# EAGLE board VelocistaEdu_completo (EAGLE 6.5.0)
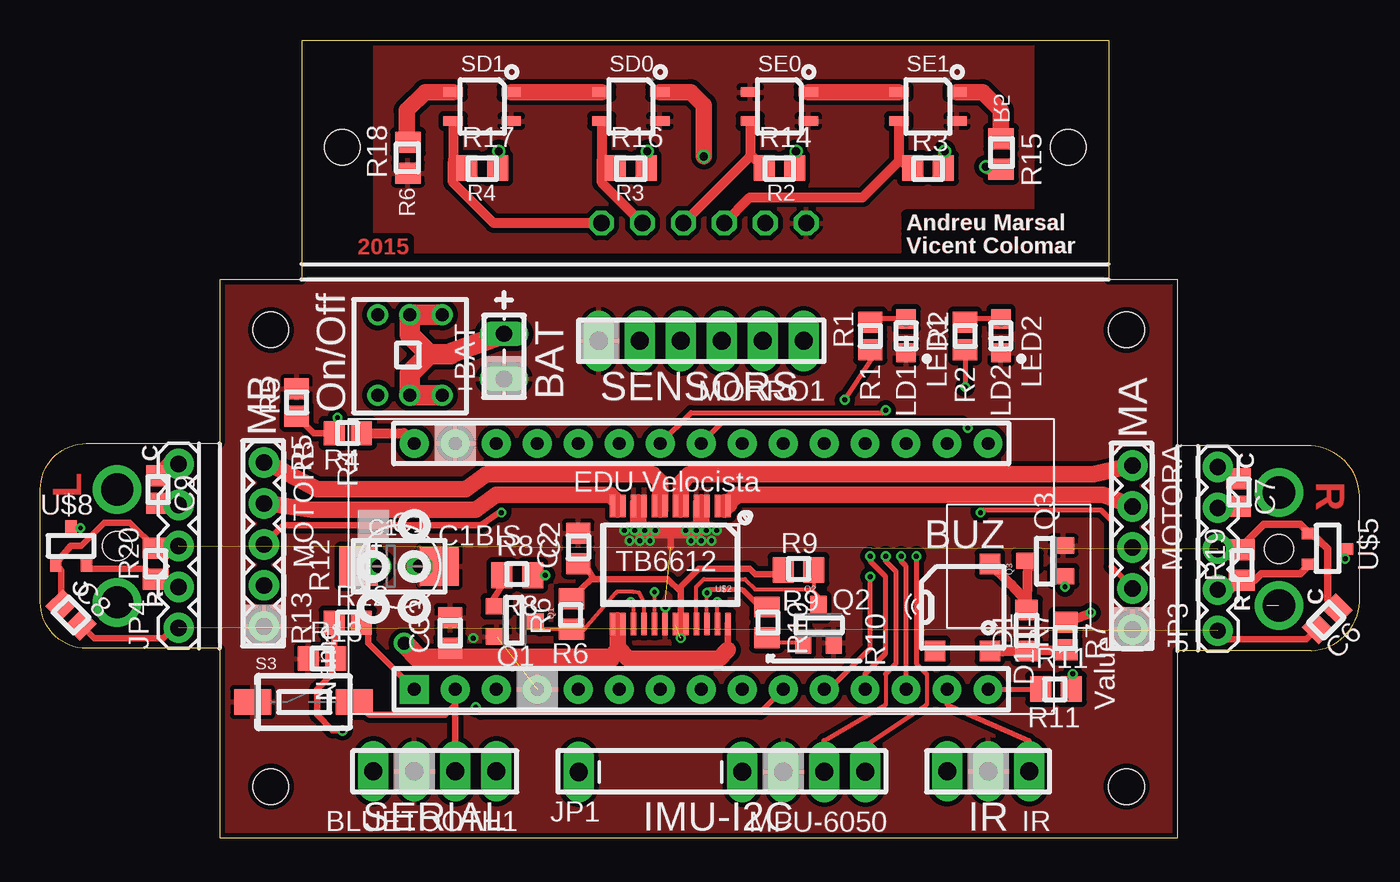
[diagram p0: board, top side]
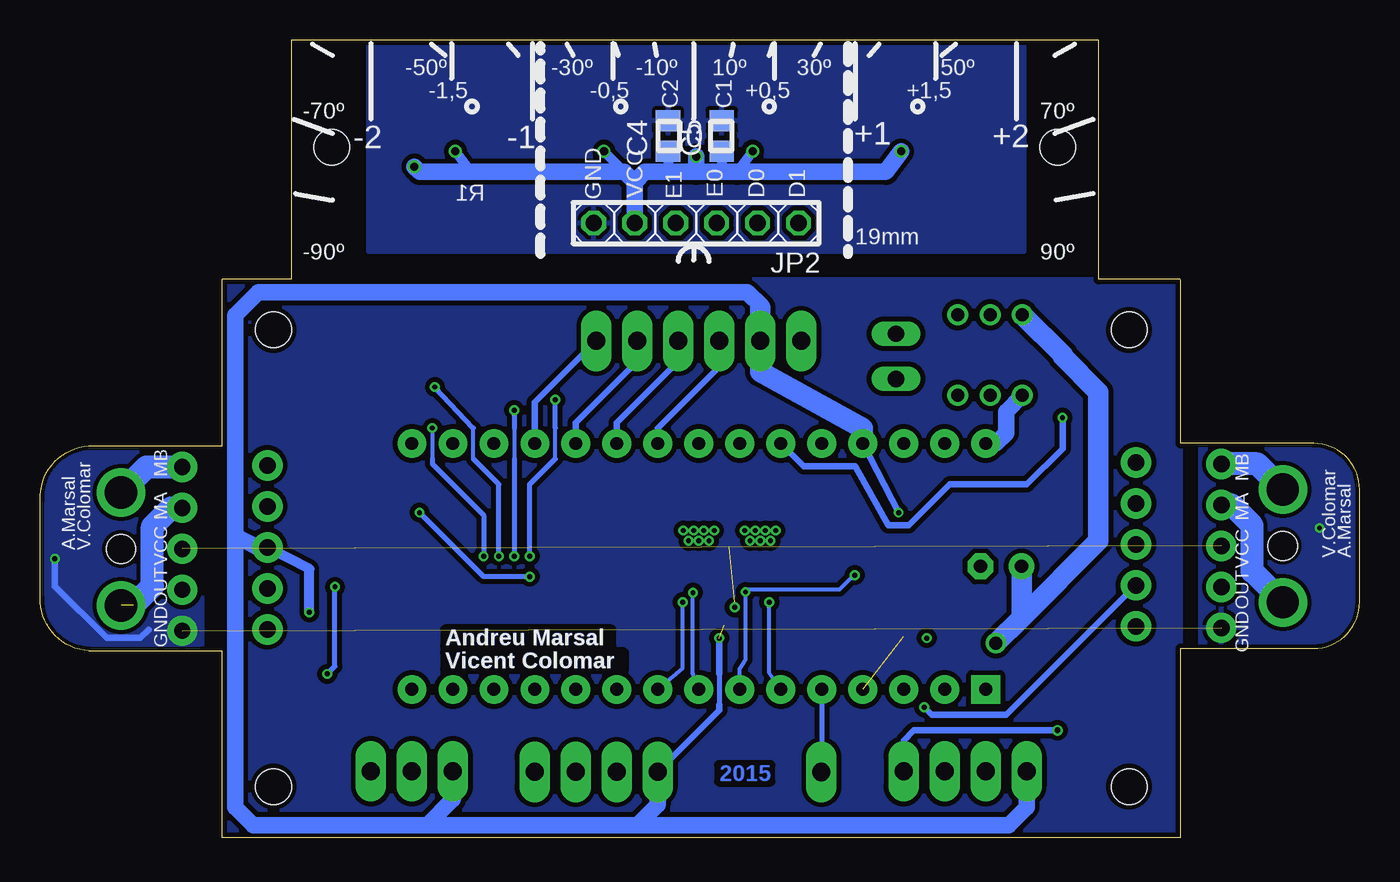
[diagram p1: board, bottom side, seen from below]

Size 81.76 x 49.42 mm. Coordinates in mm from the lower left corner, seen from the top.
Outline: 70.47,0 11.11,0 11.11,11.75 2.86,11.75 arc-90 0,14.61 0,21.59 arc-90 2.86,24.45 11.11,24.45 11.11,34.6
Outline: 71.76,24.29 78.76,24.29 arc-90 81.76,20.91 81.76,14.91 arc-90 78.76,11.61 71.76,11.61
Outline: 16.2,35.56 16.2,49.42 66.2,49.42 66.2,35.56
Outline: 11.11,34.61 16.19,34.61 16.19,35.56
Outline: 71.76,11.59 70.48,11.59 70.48,0
Outline: 71.76,24.29 70.48,24.29 70.48,34.61 66.2,34.61 66.2,35.56
Copper layers (1*16): Top 0.035mm / dielectric 1.5mm / Bottom 0.035mm
Design rules "Elecrow_2-layer_eagle_rule": minimum track width 6mil, minimum drill 12mil, track to track 6mil, track to pad 6mil, pad to pad 6mil, via to via 6mil, smd to smd 0mil, copper to edge 10mil, drill to drill 10mil, minimum pad ring 10mil, minimum via ring 6mil, stop-mask expansion 2mil, vias tented up to drill 100mil, thermal gap 10mil
Holes 2.2 mm at 67.31,31.48 67.31,3.17 14.29,31.48 14.29,3.17 18.7,42.81 63.7,42.81
Holes 1.8 mm at 76.76,17.91 4.76,18.1

## Footprints (pad centres in the part's own frame; a part is rotated, then mirrored left to right if it is on the bottom)
1X02_LOCK_LONGPADS = drill 1.016 long: 1 -0.127,0; 2 2.667,0
1X04_LONGPADS = drill 1.118 pad 1.88 long: 1 0,0; 2 2.54,0; 3 5.08,0; 4 7.62,0
SMC_C = smd 2.4 x 2.4: + -2.5,0; - 2.5,0
E2,5-5 = drill 0.813 pad 1.6: + -1.27,0 | drill 0.813 pad 1.6 octagon: - 1.27,0
C0805 = smd 1.3 x 1.5: 1 -0.95,0; 2 0.95,0
C0805' = smd 1.3 x 1.5: 1 -0.85,0; 2 0.85,0
MICROMELF-W = smd 1.27 x 1.4: A 1.268,0; C -1.268,0
AYZ0202_TH = drill 0.8: B1 -2.5,-2; B2 2.5,-2; C1 -2.5,0; C2 2.5,0; D1 -2.5,2; D2 2.5,2
1X03_LONGPADS = drill 1.118 pad 1.88 long: 1 0,0; 2 2.54,0; 3 5.08,0
1X01_LONGPAD = drill 1.118 pad 1.88 long: 1 0,0
1X06 = drill 1.016 octagon: 1 -6.35,0; 2 -3.81,0; 3 -1.27,0; 4 1.27,0; 5 3.81,0; 6 6.35,0
1X05 = drill 1.016 pad 1.88: 1 0,0; 2 2.54,0; 3 5.08,0; 4 7.62,0; 5 10.16,0
CHIPLED_0805 = smd 1.2 x 1.2: A 0,-1.05; C 0,1.05
1X06_LONGPADS = drill 1.118 pad 1.88 long: 1 0,0; 2 2.54,0; 3 5.08,0; 4 7.62,0; 5 10.16,0; 6 12.7,0
SOT23 = smd 1 x 1.4: 1 -0.95,-1.1; 2 0.95,-1.1; 3 0,1.1
R0805 = smd 1.3 x 1.5: 1 -0.85,0; 2 0.85,0
M0805@1 = smd 1.3 x 1.6: 1 -0.95,0; 2 0.95,0
M0805 = smd 1.3 x 1.6: 1 -0.95,0; 2 0.95,0
TACTILE-SWITCH-1101NE = smd 2.3 x 1.6: P$1 -3.15,0; P$2 3.15,0
SMT-0540-S-R = smd 1.27 x 1.27: + 1.7,-2.7; - 1.7,2.7; M -1.7,-2.7
QRE1113 = smd 1.2 x 0.6: 1 -1.8,-0.9; 2 1.8,-0.9; 3 1.8,0.9; 4 -1.8,0.9
PDIP-32NOHOLES = drill 0.8 pad 1.778: 3V3 7.62,-15.24; +5V 7.62,10.16; A0 7.62,-10.16; A1 7.62,-7.62; A2 7.62,-5.08; A3 7.62,-2.54; A4 7.62,0; A5 7.62,2.54; A6 7.62,5.08; A7 7.62,7.62; AREF 7.62,-12.7; D0/RX -7.62,15.24; D2 -7.62,7.62; D3 -7.62,5.08; D4 -7.62,2.54; D5 -7.62,0; D6 -7.62,-2.54; D7 -7.62,-5.08; D8 -7.62,-7.62; D9 -7.62,-10.16; D10 -7.62,-12.7; D11 -7.62,-15.24; D12 -7.62,-17.78; D13 7.62,-17.78; GND -7.62,10.16; GND1 7.62,15.24; RESET -7.62,12.7; RESET1 7.62,12.7; VIN 7.62,17.78 | drill 0.8 pad 1.778 square: D1/TX -7.62,17.78
SSOP24 = smd 0.348 x 1.397: 1 -3.575,-3.656; 2 -2.925,-3.656; 3 -2.275,-3.656; 4 -1.625,-3.656; 5 -0.975,-3.656; 6 -0.325,-3.656; 7 0.325,-3.656; 8 0.975,-3.656; 9 1.625,-3.656; 10 2.275,-3.656; 11 2.925,-3.656; 12 3.575,-3.656; 13 3.575,3.656; 14 2.925,3.656; 15 2.275,3.656; 16 1.625,3.656; 17 0.975,3.656; 18 0.325,3.656; 19 -0.325,3.656; 20 -0.975,3.656; 21 -1.625,3.656; 22 -2.275,3.656; 23 -2.925,3.656; 24 -3.575,3.656
TERMINAL_MOTOR_N20 = drill 2 pad 3: P$1 0,0
DBZ_R-PDSO-G3 = smd 0.7 x 1: 1 -0.95,-1.1; 2 0.95,-1.1; 3 0,1.1

## Placement (x,y rotation side)
+BAT  [1X02_LOCK_LONGPADS]  28.73,28.57 90 top
BLUETOOTH1  [1X04_LONGPADS]  28.26,4.13 180 top
C1  >=10 uF  [SMC_C]  22.23,16.83 0 top
C1BIS  [E2,5-5]  22.23,16.83 0 top
C2  100nF  [C0805]  33.34,17.94 90 top
C3  100nF  [C0805]  25.4,12.7 90 top
C4  1uF  [C0805]  42.86,43.5 90 bottom
C5  100nF  [C0805]  39.53,43.5 90 bottom
C6  100nF  [C0805']  79.75,13.58 225 top
C7  3.3nF  [C0805']  74.26,21.4 270 top
C8  100nF  [C0805']  1.91,13.81 315 top
C9  3.3nF  [C0805']  7.3,21.59 270 top
D1  [MICROMELF-W]  61.12,12.86 90 top
GENERAL_SWITCH  AYZ0202_TH  [AYZ0202_TH]  22.9,29.92 270 top
IR  [1X03_LONGPADS]  61.28,4.13 180 top
JP1  [1X01_LONGPAD]  33.35,4.08 180 top
JP2  [1X06]  41.11,38.1 180 bottom
JP3  [1X05]  72.96,12.83 90 top
JP4  [1X05]  8.57,13.02 90 top
LED1  [CHIPLED_0805]  53.66,31.11 180 top
LED2  [CHIPLED_0805]  59.53,31.11 180 top
MORRO1  [1X06_LONGPADS]  47.31,30.8 180 top
MOTORA  [1X05]  67.69,23.08 270 top
MOTORB  [1X05]  13.86,23.27 270 top
MPU-6050  [1X04_LONGPADS]  51.13,4.09 180 top
Q1  [SOT23]  29.39,13.41 270 top
Q2  [SOT23]  48.22,13.2 0 top
Q3  [SOT23]  62.28,17.17 90 top
R1  470  [R0805]  51.43,31.11 90 top
R2  470  [R0805]  57.31,31.11 90 top
R3  [M0805@1]  55.01,41.51 0 top
R4  33K  [R0805]  19.05,25.08 180 top
R5  39K  [R0805]  15.87,26.99 90 top
R6  [M0805]  32.92,13.87 90 top
R7  22  [R0805]  63.53,12.5 90 top
R8  [M0805]  29.55,16.28 180 top
R9  [M0805]  46.98,16.6 180 top
R10  [M0805]  45.03,13.36 270 top
R11  180  [M0805]  62.95,9.23 0 top
R12  470  [R0805]  19.05,13.34 0 top
R13  470  [R0805]  17.46,11.11 0 top
R14  [M0805]  45.8,41.51 0 top
R15  [M0805]  59.53,42.39 270 top
R16  [M0805]  36.59,41.51 0 top
R17  [M0805]  27.38,41.51 0 top
R18  [M0805]  22.78,42.15 90 top
R19  10k  [M0805]  74.46,16.91 90 top
R20  10k  [M0805]  7.14,16.99 90 top
S3  SWITCH-MOMENTARY-2-SMD-1101NE  [TACTILE-SWITCH-1101NE]  16.31,8.42 0 top
SPK1  SMT-0540-S-R  [SMT-0540-S-R]  57.15,14.29 0 top
U1  QRE1113  [QRE1113]  55.01,45.32 180 top
U2  QRE1113  [QRE1113]  45.8,45.32 180 top
U3  QRE1113  [QRE1113]  36.59,45.32 180 top
U4  QRE1113  [QRE1113]  27.38,45.32 180 top
U$1  ARDUINONANONOHOLES  [PDIP-32NOHOLES]  40.95,16.82 90 top
U$2  TB6612FNG  [SSOP24]  39.04,16.92 180 top
U$3  TERMINAL_MOTOR_N20  [TERMINAL_MOTOR_N20]  76.76,21.41 270 top
U$4  TERMINAL_MOTOR_N20  [TERMINAL_MOTOR_N20]  76.76,14.41 270 top
U$5  DRV5013  [DBZ_R-PDSO-G3]  79.76,17.91 270 top
U$6  TERMINAL_MOTOR_N20  [TERMINAL_MOTOR_N20]  4.76,21.6 90 top
U$7  TERMINAL_MOTOR_N20  [TERMINAL_MOTOR_N20]  4.76,14.6 90 top
U$8  DRV5013  [DBZ_R-PDSO-G3]  1.91,18.1 0 top

## Library data of the parts
+BAT BLUETOOTH1 IR JP3 JP4 MORRO1 MPU-6050 Q1-Q3 U1-U4 = SparkFun
C1 C1BIS C2-C5 R6 R8-R11 R14-R18 = rcl
C6-C9 R1-R5 R7 R12 R13 R19 R20 = resistor
D1 = diode
GENERAL_SWITCH = 1r_BAT_guissona
JP1 MOTORA MOTORB = SparkFun-Connectors
JP2 SPK1 = adafruit
LED1 LED2 = led
S3 = SparkFun-Electromechanical
U$1 = jet-lib
U$2 = SparkFun-PowerIC; PROD_ID: IC-09363
U$3 U$4 U$6 U$7 = ARE_connectors
U$5 U$8 = texas

## Nets
A01: MOTORA.2 U$2.1 U$2.2
A02: MOTORA.1 U$2.5 U$2.6
ARD_TX: R12.2 U$1.D1/TX
B01: MOTORB.2 U$2.11 U$2.12
B02: MOTORB.1 U$2.7 U$2.8
BT_RX: BLUETOOTH1.1 R12.1 R13.2
BT_TX: BLUETOOTH1.2 S3.P$2 U$1.D0/RX
BUZZ: R11.1 U$1.D12
DIRA: R10.1 U$1.D5 U$2.22
DIRANEG: Q2.3 R9.1 U$2.21
DIRB: R8.1 U$1.D4 U$2.17
DIRBNEG: Q1.3 R6.1 U$2.16
ENCA: MOTORA.4 U$1.D8
ENCB: MOTORB.4 U$1.D7
GND: +BAT.1 BLUETOOTH1.3 C1.- C1BIS.- C2.2 C3.2 IR.2 LED1.C LED2.C MORRO1.6 MOTORA.5 MOTORB.5 MPU-6050.3 Q1.2 Q2.2 Q3.2 R5.2 R13.1 S3.P$1 U$1.GND U$1.GND1 U$2.3 U$2.4 U$2.9 U$2.10 U$2.18
GND1: C4.2 C5.2 JP2.6 R18.1 U1.4 U2.2 U2.4 U3.4 U4.4
GND2: C6.2 C8.2 JP3.1 JP4.1 U$5.3 U$8.3
INT: JP1.1 U$1.D2
IR: IR.1 U$1.D11
LD1: R1.1 U$1.D9
LD2: R2.1 U$1.D10
LMOTORA: C9.1 JP4.5 U$6.P$1
LMOTORB: C9.2 JP4.4 U$7.P$1
LOUT: JP4.2 R20.1 U$8.2
N$1: +BAT.2 GENERAL_SWITCH.C1 GENERAL_SWITCH.C2 GENERAL_SWITCH.D1 GENERAL_SWITCH.D2
N$2: LED1.A R1.2
N$3: D1.C R7.1 SPK1.+
N$4: R18.2 U4.2
N$5: LED2.A R2.2
N$6: Q2.1 R10.2
N$7: Q3.1 R11.2
N$8: D1.A Q3.3 SPK1.-
N$9: Q1.1 R8.2
N$63: U1.2 U2.1
N$65: U3.2 U4.1
N$67: R15.1 U1.1
PWMA: U$1.D6 U$2.23
PWMB: U$1.D3 U$2.15
RMOTORA: C7.1 JP3.5 U$3.P$1
RMOTORB: C7.2 JP3.4 U$4.P$1
ROUT: JP3.2 R19.1 U$5.2
SCL: MPU-6050.2 U$1.A5
SD0: MORRO1.3 U$1.A2
SD1: MORRO1.4 U$1.A3
SD2: JP2.2 R16.1 U3.3
SD3: JP2.1 R17.1 U4.3
SDA: MPU-6050.1 U$1.A4
SE0: MORRO1.2 U$1.A1
SE1: MORRO1.1 U$1.A0
SE2: JP2.4 R3.1 U1.3
SE3: JP2.3 R14.1 U2.3
VCC: C4.1 C5.1 JP2.5 R3.2 R14.2 R15.2 R16.2 R17.2 U3.1
VCC1: C6.1 C8.1 JP3.3 JP4.3 R19.2 R20.2 U$5.1 U$8.1
VCCARD: BLUETOOTH1.4 C2.1 IR.3 MORRO1.5 MOTORA.3 MOTORB.3 MPU-6050.4 R6.2 R7.2 R9.2 U$1.+5V U$2.19 U$2.20
VINMOT: C1.+ C1BIS.+ C3.1 GENERAL_SWITCH.B1 U$2.13 U$2.14 U$2.24
VINVREG: GENERAL_SWITCH.B2 R4.1 U$1.VIN
VREFBAT: R4.2 R5.1 U$1.A6

## Tracks (layer width: path | path; a pad name or v marks a point on that pad's centre or on a via)
A01
  Top 0.254: U$2.1 42.54,20.48 42.39,20.48 | 42.39,20.64 42.07,20.64 U$2.2
  Top 1.016: 42.39,20.32 42.39,20.48 42.39,20.64 42.39,20.8 42.7,20.64 42.7,20.8 43.18,21.27 65.88,21.27 MOTORA.2
A02
  Top 0.254: U$2.5 40,20.48 39.69,20.48 | 39.69,20.64 39.37,20.64 U$2.6
  Top 1.016: 39.69,20.32 39.69,20.48 39.69,20.64 39.69,21.99 40.23,22.53 65.01,22.54 65.25,22.54 MOTORA.1
ARD_TX
  Top 0.406: U$1.D1/TX 20.32,12.06 20.32,13.34 R12.2
B01
  Top 0.254: U$2.11 36.04,20.48 35.8,20.48 | 35.8,20.64 35.56,20.64 U$2.12
  Top 1.016: 35.8,20.32 35.8,20.48 35.8,20.64 35.8,20.8 35.32,21.27 28.26,21.27 26.99,20.32 16.83,20.32 14.03,20.73 MOTORB.2
B02
  Top 0.254: U$2.7 38.58,20.48 38.42,20.48 | 38.42,20.64 38.1,20.64 U$2.8
  Top 1.016: 38.42,20.32 38.42,20.48 38.42,20.64 38.42,22.07 37.94,22.54 27.62,22.54 26.35,21.59 17.14,21.59 14.03,23.27 MOTORB.1
BT_RX  (via drill 0.35)
  Top 0.406: v18.73,6.67 18.1,6.67 17.14,7.62 17.14,9.21 18.1,10.16 18.1,11.11 R13.2 18.2,11.11 R12.1
  Bottom 0.406: v18.73,6.67 27.62,6.67 28.26,6.03 BLUETOOTH1.1
BT_TX
  Top 0.305: U$1.D0/RX
  Top 0.406: U$1.D0/RX BLUETOOTH1.2 | S3.P$2 20.42,7.62 25.08,7.62 25.71,8.25 U$1.D0/RX
BUZZ
  Top 0.305: U$1.D12 61.96,9.2 R11.1
DIRA  (via drill 0.3 pad 0.61)
  Top 0.254: U$2.22 41.31,15.04 v41.31,15.2
  Top 0.305: v41.31,15.2 41.51,15.4 43.5,15.4 44.59,14.31 R10.1
  Bottom 0.254: U$1.D5 41.31,10.2 v41.31,15.2
DIRANEG
  Top 0.254: U$2.21 40.66,14.58 40.64,14.61 40.64,15.56 41.12,16.03 43.66,16.03 44.29,15.4 47.78,15.4 | 47.78,15.4 48.22,14.96 Q2.3 | R9.1 47.93,15.55 47.78,15.4
DIRB  (via drill 0.3 pad 0.61)
  Top 0.254: U$2.17 v38.06,15.24
  Top 0.305: v31.3,16.28 R8.1
  Bottom 0.254: U$1.D4 38.42,10.48 38.06,11.07 38.06,12.02 v38.06,15.24 38.06,15.28 37.94,15.4 32.23,15.4 31.34,16.28 v31.3,16.28
DIRBNEG
  Top 0.254: 30,13.49 Q1.3 30.98,12.92 R6.1 33.71,12.92 35.66,15.18 35.72,15.24 36.75,15.24 37.11,15.2 37.41,14.58 U$2.16
ENCA  (via drill 0.3 pad 0.61)
  Top 0.305: U$1.D8 48.89,9.2 51.43,11.75 v51.43,16.19 | v58.26,20.16 58.42,20.32 65.72,20.32 66.36,19.68 66.36,16.83 67.63,15.56 MOTORA.4
  Bottom 0.305: v51.43,16.19 54.29,16.19 v58.26,20.16
ENCB  (via drill 0.3 pad 0.61)
  Top 0.305: U$1.D7 44.61,7.78 27.3,7.78 v26.99,8.1
  Bottom 0.305: v26.99,8.1 26.67,7.78
  Bottom 0.406: 26.67,7.78 26.51,7.62 21.91,7.62 13.88,15.65 MOTORB.4
GND  (via drill 0.3 pad 0.61)  (2 unrouted)
  Top 0.305: U$2.18 38.71,14.27 v38.74,14.29
  Top 0.406: 39.05,18.02 39.05,18.97 38.97,19.05 | v38.74,14.29 38.74,14.61
  Top 1.016: 40.96,20.8 40.96,19.37 v40.64,19.05 38.97,19.05 37.23,19.05 37.07,19.21 37.07,20.8
  other vias: 37.46,19.05 41.27,19.05 36.83,19.05 26.83,12.38 36.2,19.05 38.1,19.05 37.15,18.41 36.51,18.41 37.78,18.41 40,19.05 41.91,19.05 40.32,18.41 40.96,18.41 41.59,18.41
  pour Top (isolate 0.305): 11.11,0 70.48,0 70.48,34.61 11.11,34.61
GND1
  pour Top (isolate 0.305): 61.44,36.35 20.8,36.35 20.8,49.21 61.44,49.21
  pour Bottom (isolate 0.305): 61.43,36.35 20.8,36.35 20.8,49.21 61.43,49.21
GND2  (via drill 0.3 pad 0.61)  (1 unrouted)
  Top 0.406: v80.86,17.31 U$5.3 | C6.2 78.44,12.31 73.49,12.31 JP3.1 | C8.2 3.33,12.38 7.62,12.38 8.25,13.02 JP4.1 | v2.49,19.2 2.18,19.2 U$8.3
  Bottom 0.406: 75.06,12.91 75.56,12.41 77.66,12.41 80.86,15.61 v80.86,17.31
  pour Bottom (isolate 0.254, no thermals): 71.73,24.31 71.73,11.63 78.88,11.61 arc90 81.76,14.91 81.76,21.11 arc90 79.08,24.29
  pour Bottom (isolate 0.254): 9.84,11.75 9.84,24.45 0,24.45 0,11.75
INT
  Bottom 0.305: U$1.D2 33.33,4.1 JP1.1
IR
  Top 0.305: U$1.D11 56.19,8.26 61.28,6.03 IR.1
LD1  (via drill 0.3 pad 0.61)
  Top 0.305: U$1.D9 51.11,10.16 52.39,11.43 52.39,16.19 51.43,17.14 v51.43,17.46 | v49.85,27.15 51.49,29.63 R1.1
  Bottom 0.254: 49.85,23.5 49.85,25.4
  Bottom 0.305: v51.43,17.46 51.43,21.91 49.85,23.5 | 49.85,25.4 v49.85,27.15
LD2  (via drill 0.3 pad 0.61)
  Top 0.305: U$1.D10 53.65,16.83 53.34,17.14 v53.34,17.46 | R2.1 v57.31,27.94
  Bottom 0.254: 54.93,23.5 54.93,25.4
  Bottom 0.305: v53.34,17.46 53.34,21.91 54.93,23.5 | 54.93,25.4 v57.31,27.94
LMOTORA
  Top 1.016: C9.1 8.04,23.18 JP4.5
  Bottom 1.422: U$6.P$1 6.34,23.18 JP4.5
LMOTORB
  Top 1.016: C9.2 7.41,20.64 JP4.4
  Bottom 1.422: U$7.P$1 6.67,16.51 6.67,19.37 7.94,20.64 JP4.4
LOUT
  Top 0.406: JP4.2 8.09,16.04 R20.1 6.51,16.67 4.13,16.67 3.16,16.68 U$8.2
N$1
  Top 1.27: 24.1,29.97 22.9,28.77 GENERAL_SWITCH.C2 GENERAL_SWITCH.D2 | 24.1,29.97 22.9,31.17 GENERAL_SWITCH.C1 GENERAL_SWITCH.D1 | 24.1,29.97 25.24,29.97 | 25.24,29.97 25.43,29.97 | +BAT.2 25.24,29.97
N$2
  Top 0.305: LED1.A 51.64,32.16 R1.2
N$3
  Top 0.61: R7.1 61.12,11.56 | 61.12,11.56 59.61,11.56 SPK1.+ | D1.C 61.12,11.56
N$4
  Top 0.61: 22.7,43.18 R18.2
  Top 1.016: U4.2 23.84,46.22 22.7,45.09 22.7,43.18
N$5
  Top 0.305: LED2.A 57.11,32.16 R2.2
N$6
  Top 0.254: Q2.1 45.34,12.1 R10.2
N$7  (via drill 0.3 pad 0.61)
  Top 0.305: R11.2 63.9,10.08 v63.98,10.16 | v63.5,15.56 63.5,16.1 Q3.1
  Bottom 0.305: v63.98,10.16 63.5,10.64 v63.5,15.56
N$8
  Top 0.61: Q3.3 61.12,14.63 | 61.12,14.63 60.1,15.74 SPK1.- | D1.A 61.12,14.63
N$9
  Top 0.254: 27.94,14.29 Q1.1
  Top 0.406: 27.94,14.29 27.94,14.61 28.57,15.56 28.57,15.94 R8.2
N$63
  Top 1.016: U1.2 U2.1
N$65
  Top 1.016: U3.2 U4.1
N$67
  Top 1.016: U1.1 58.39,46.22 59.53,45.09 R15.1
PWMA  (via drill 0.3 pad 0.61)
  Top 0.254: U$2.23 41.96,14.59 v41.95,14.61
  Bottom 0.254: U$1.D6 41.95,10.51 v41.95,14.61
PWMB  (via drill 0.3 pad 0.61)
  Top 0.254: U$2.15 36.76,14.43 v36.59,14.61
  Bottom 0.254: U$1.D3 36.59,10.24 v36.59,14.61
RMOTORA
  Top 0.406: JP3.5 73.71,22.25 C7.1
  Bottom 1.422: U$3.P$1 75.17,22.99 JP3.5
RMOTORB  (1 unrouted)
  Top 0.406: C7.2 74.16,20.45 JP3.4
  Bottom 1.422: 76,14.41 74.82,15.59 74.82,19.29 73.65,20.45 JP3.4
ROUT
  Top 0.406: R19.1 73.87,15.37 JP3.2
  Top 0.457: U$5.2 78.08,16.38 75.67,16.38 75.25,15.96 R19.1
S$1
  pour Bottom (isolate 0.305): 11.11,0 70.48,0 70.48,34.61 11.11,34.61
SCL  (via drill 0.3 pad 0.61)
  Top 0.254: 52.39,10.16 52.39,8.26
  Top 0.305: U$1.A5 40.32,26.35 52.23,26.35 v52.39,26.51 | v52.39,17.46 52.39,17.14 53.02,16.51 53.02,10.79 52.39,10.16 | MPU-6050.2 48.58,4.1 48.58,6.03 52.39,8.26
  Bottom 0.254: 52.39,25.4 52.39,23.5
  Bottom 0.305: v52.39,26.51 52.39,25.4 | 52.39,23.5 v52.39,17.46
SD0
  Bottom 0.406: MORRO1.3 42.23,29.53 46.04,25.72 U$1.A2
SD1
  Bottom 0.406: MORRO1.4 39.69,29.21 43.5,25.4 U$1.A3
SD2
  Top 0.61: U3.3 34.79,42.05 | 34.79,42.05 R16.1 | JP2.2 34.79,40.61 34.79,42.05
SD3
  Top 0.61: U4.3 25.58,42.05 25.64,41.99 | 25.64,41.99 R17.1 | JP2.1 28.1,38.1 25.56,40.64 25.56,41.91 25.64,41.99
SDA  (via drill 0.3 pad 0.61)
  Top 0.254: 54.93,10.16 54.93,8.26
  Top 0.305: U$1.A4 42.23,25.72 57.15,25.72 v57.47,25.4 | v54.29,17.46 54.29,10.79 54.93,10.16 | MPU-6050.1 51.12,4.1 51.12,5.71 54.93,8.26
  Bottom 0.254: v57.47,25.4 57.47,23.5
  Bottom 0.305: 57.47,23.5 57.47,23.18 54.29,20 v54.29,17.46
SE0
  Bottom 0.406: MORRO1.2 44.77,29.53 48.58,25.72 U$1.A1
SE1
  Bottom 0.406: MORRO1.1 51.12,26.99 U$1.A0
SE2
  Top 0.61: U1.3 53.21,42.05 53.26,41.99 | 53.26,41.99 R3.1 | JP2.4 43.97,39.69 50.96,39.69 53.26,41.99
SE3
  Top 0.61: U2.3 44,42.55 44,42.36 | 44,42.36 R14.1 | JP2.3 44,42.25 44,42.36
VCC  (via drill 0.5)
  Top 0.61: R17.2 28.33,42.46 v28.42,42.55 | R16.2 37.54,42.46 v37.62,42.55 | R3.2 55.96,42.46 v56.04,42.55 | R15.2 58.74,41.44 v58.58,41.59 | R14.2 46.75,42.46 v46.83,42.55
  Top 1.016: U3.1 40.3,46.22 41.12,45.4 v41.11,42.23
  Bottom 0.61: v37.62,42.55 38.57,41.27 | v56.04,42.55 55.09,41.27 | v46.83,42.55 45.56,41.27 | C4.1 42.86,41.27 | C5.1 39.53,41.27
  Bottom 1.016: JP2.5 44.92,40.64 | 44.92,40.64 45.56,41.27 55.09,41.27 58.26,41.27 v58.58,41.59 | v28.42,42.55 29.37,41.27 38.57,41.27 39.53,41.27 41.11,41.27 | 41.11,41.27 42.86,41.27 44.29,41.27 44.92,40.64 | v41.11,42.23 41.11,41.27
VCC1  (1 unrouted)
  Top 0.406: U$5.1 78.81,18.86 | 79.8,14.76 C6.1 | C8.1 1.3,16.56 U$8.1 1.89,18.1 2.54,18.1 3.97,19.53 5.55,19.53 R20.2 8.41,17.94 JP4.3 | R19.2 74.4,17.91 JP3.3
  Top 0.457: 78.81,18.86 79.8,17.93 79.8,14.76 | U$5.1 78.09,19.43 75.8,19.43 74.46,18.08 R19.2
VCCARD  (via drill 0.3 pad 0.61)  (1 unrouted)
  Top 0.254: U$2.19 39.37,13.18 40,13.18 U$2.20 40,13.34
  Top 0.305: R9.2 45.72,16.5 45.56,16.35
  Top 0.406: 45.56,16.35 44.29,16.35 43.97,16.67 40.8,16.67 39.69,15.56 39.69,15.24 | 39.69,15.24 38.89,16.03 34.29,16.03 | 34.29,16.03 34.13,16.03 33.55,15.46 R6.2 | 39.69,15.24 v39.69,12.38 | MOTORB.3 15.04,19.37 27.3,19.37 28.42,20.16 v28.57,20.16 | C2.1 33.5,16.82 33.82,16.82 34.29,16.03
  Top 0.61: R7.2 65.12,13.94 v65.09,13.97
  Bottom 0.305: 39.69,10.16 39.69,8.26
  Bottom 0.406: v39.69,12.38 39.69,10.16 | 39.69,8.26 39.69,7.91 MPU-6050.4 | v28.57,20.16 U$1.+5V
  Bottom 0.61: v65.09,13.97 65.09,16.67 MOTORA.3
  Bottom 1.016: 37.15,32.86 37.07,32.94 37.94,33.81 68.26,33.81 69.69,32.38 69.69,18.73 | 69.69,18.73 69.69,1.91 68.58,0.79 57.78,0.79 | MOTORA.3 68.33,18 69.69,18.73 | IR.3 56.2,2.38 57.78,0.79 | 44.77,0.79 21.75,0.79 20.64,1.91 BLUETOOTH1.4 | MPU-6050.4 43.51,2.05 44.77,0.79 | 44.77,0.79 57.78,0.79
  Bottom 1.27: U$1.+5V 30.79,25.4 37.15,28.89 MORRO1.5 37.15,32.86
VINMOT  (via drill 0.8 pad 1.27)
  Top 0.254: U$2.14 36.04,13.18 35.8,13.18 | 35.8,12.86 35.72,12.86 U$2.13
  Top 0.305: C3.1 25.4,11.11
  Top 0.406: U$2.24 42.61,11.66
  Top 1.016: 42.61,11.66 42.07,11.11 36.43,11.11 35.84,11.71 | 35.84,11.71 35.8,11.75 35.8,12.86 35.8,13.18 35.8,13.49 | 35.24,11.11 35.84,11.71
  Top 1.27: v22.54,12.06 23.49,11.11 25.4,11.11 35.24,11.11 | C1.+ C1BIS.+
  Bottom 1.27: GENERAL_SWITCH.B1 18.42,29.93 18.42,29.84 16.19,27.62 16.19,18.41 20.96,13.65 | 20.96,13.65 v22.54,12.06 | C1BIS.+ 20.96,13.65
VINVREG
  Top 0.61: R4.1 22.53,25.08 U$1.VIN
  Bottom 1.016: U$1.VIN 22.55,24.44 21.91,25.08 21.91,26.41 GENERAL_SWITCH.B2
VREFBAT  (via drill 0.3 pad 0.61)
  Top 0.406: R5.1 16.93,25.08 R4.2 18.42,25.5 v18.42,26.04
  Bottom 0.406: U$1.A6 34.45,23.02 31.27,23.02 29.21,19.37 27.94,19.37 25.4,21.91 20.64,21.91 18.42,24.13 v18.42,26.04

## Text on the board
Top: Andreu Marsal | 2015 | Vicent Colomar | R | L
Bottom: Andreu Marsal | Vicent Colomar | 2015
_tsilk: SD1 | SD0 | SE0 | SE1 | R5 | R6 | R4 | R3 | R2 | Andreu Marsal | Vicent Colomar | BAT | SENSORS | R1 | LD1 | R2 | LD2 | On/Off | MB | MA | C | R5 | EDU Velocista | C | R4 | C1 | Q3 | TB6612 | R9 | BUZ | R8 | C2 | C | R13 | R12 | R | R | Q2 | C | C3 | R7 | Q1 | R6 | D1 | R10 | R11 | SERIAL | IMU-I2C | IR
_bsilk: 50º | 30º | 10º | -10º | -30º | -50º | -0,5 | -1,5 | 70º | +1,5 | +0,5 | -70º | C1 | C2 | -1 | -2 | +2 | +1 | 0 | D1 | D0 | E0 | E1 | VCC | GND | R1 | 90º | 19mm | -90º | MB | MB | MA | MA | VCC | V.Colomar | A.Marsal | A.Marsal | V.Colomar | OUT | VCC | GND | OUT | Andreu Marsal | GND | Vicent Colomar